# Altium PCB YFCX_4S5P_ZJB_V10_260724.PcbDoc
Units mm, origin at the board's own origin, x right, y up, seen from the top; angles counter-clockwise.
Board outline 85 x 54 mm, 2 copper layers (Top Layer, Bottom Layer); 95 components, 55 nets, 292 pads, 259 vias.
Unrouted connection lines stored in the file: 77.
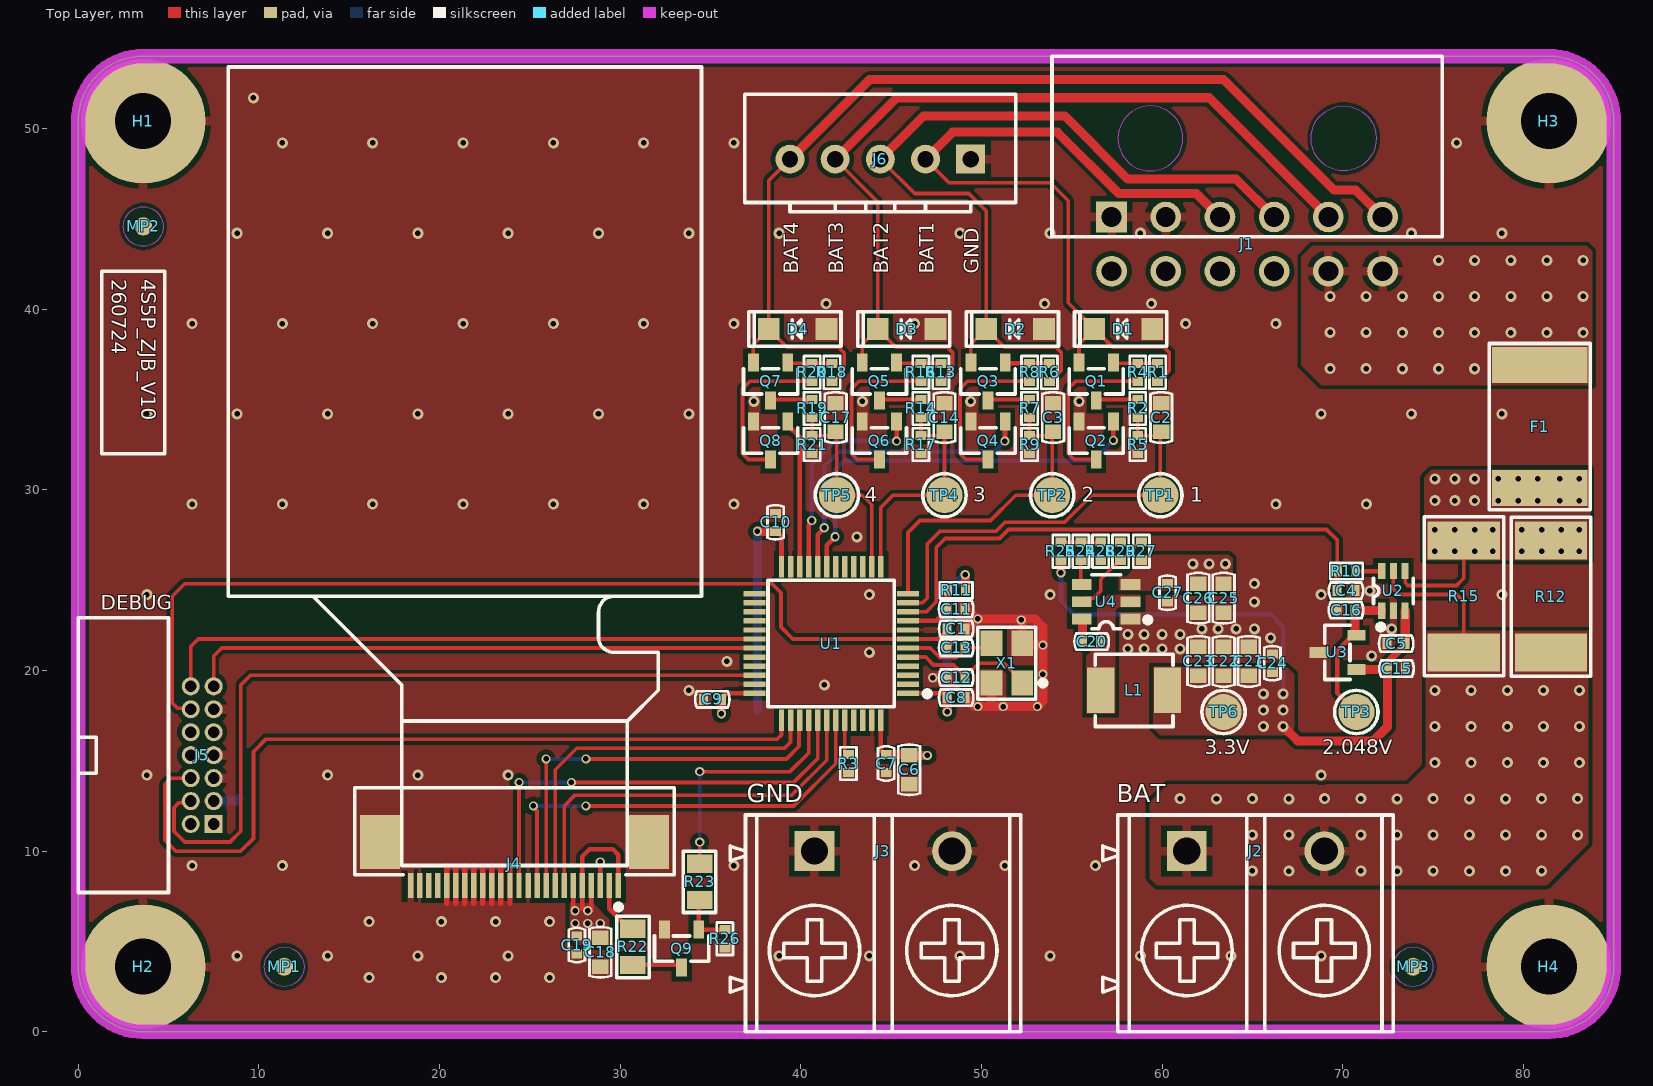
[diagram p0: Top Layer view]
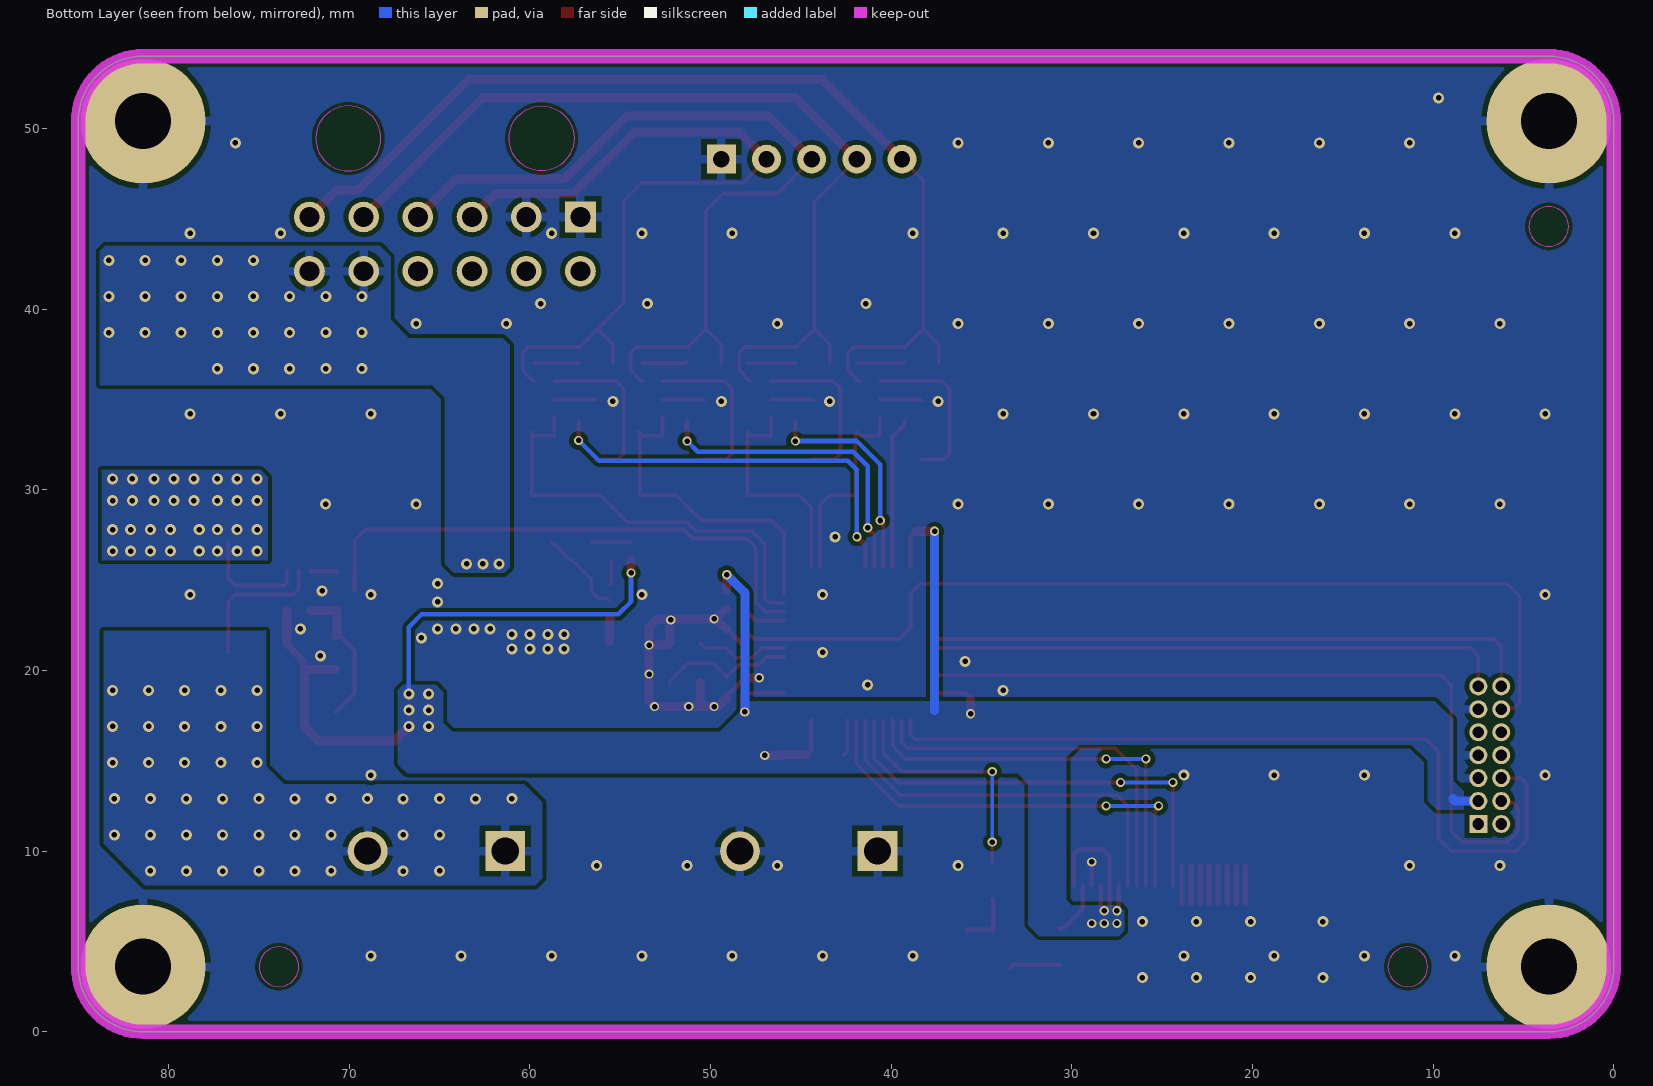
[diagram p1: Bottom Layer view, seen from below]
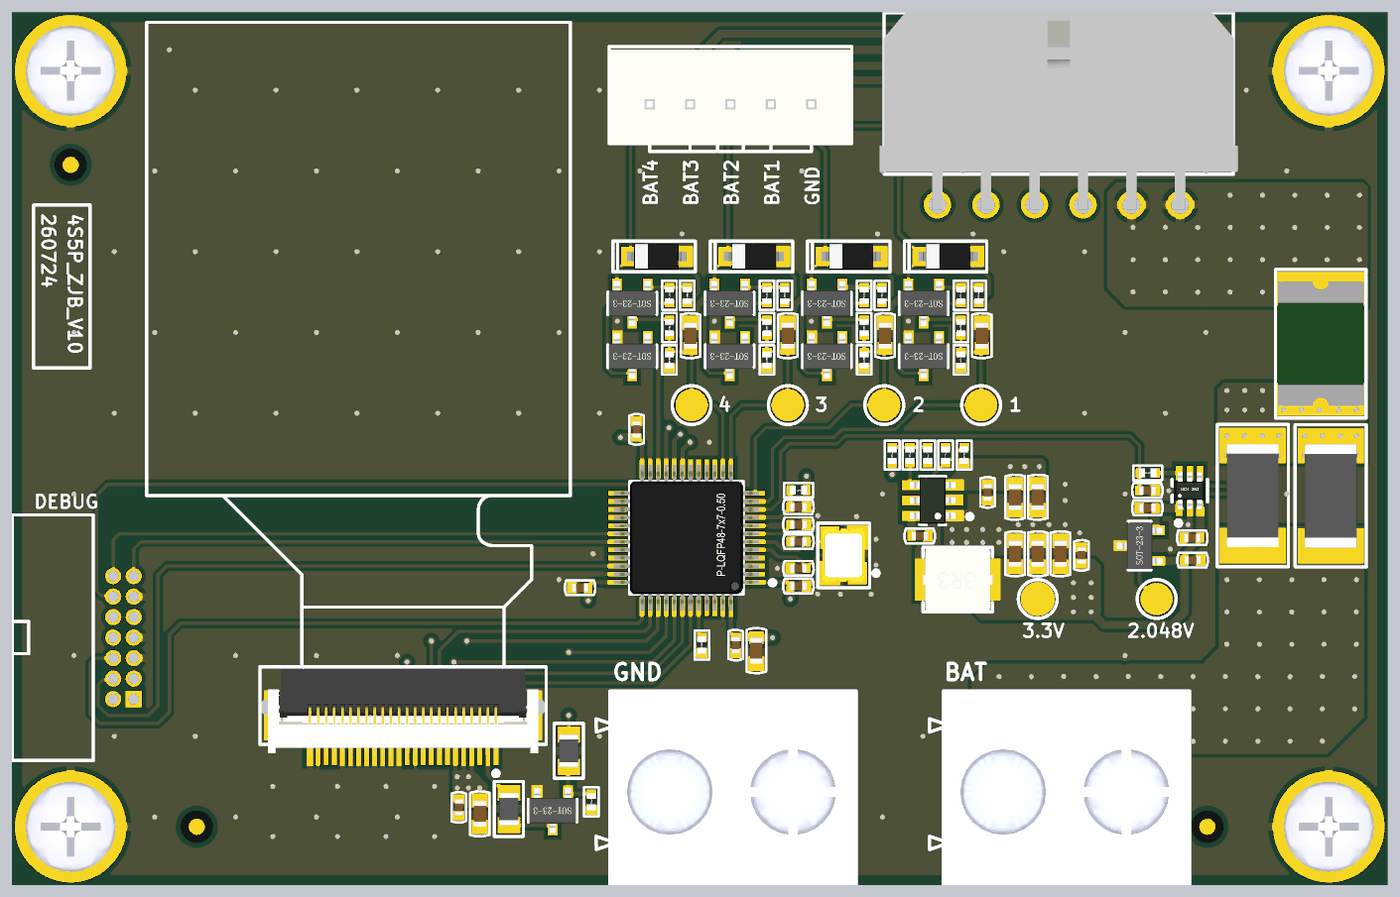
[diagram p2: 3D render of the assembled board from above, using the file's embedded part models]

## Layer stack, top to bottom
Top Solder: solder mask 0.0102, Solder Resist, Dk 3.5
Top Layer: signal copper 0.0356
Dielectric 1: dielectric 0.32, FR-4, Dk 4.8
Bottom Layer: signal copper 0.0356
Bottom Solder: solder mask 0.0102, Solder Resist, Dk 3.5

## Board outline
0,3.6 0,50.4 cw(c3.6,50.4) 3.6,54 81.4,54 cw(c81.4,50.4) 85,50.4 85,3.6 cw(c81.4,3.6) 81.4,0 3.6,0 cw(c3.6,3.6)

## Design rules (kind name [scope] priority, off if disabled: settings)
BoardOutlineClearance GND [InNamedPolygon('GND')] p1: gap=1 ignorepadtopadclearanceinfootprint=FALSE
Clearance Clearance_1 [InPoly vs OnLayer('Mechanical 1')] p1 off: gap=3 ignorepadtopadclearanceinfootprint=FALSE
Clearance [All] p2: gap=0.2 ignorepadtopadclearanceinfootprint=FALSE except(0.15: Arc-Arc Arc-Track Arc-Text Arc-Hole Track-Track Track-Text Track-Hole SMDPad-Text SMDPad-Hole THPad-Text THPad-Hole Via-Text Via-Hole Fill-Text Fill-Hole Poly-Text Poly-Hole Region-Text Region-Hole Text-Text Text-Hole; 0.254: SMDPad-Fill SMDPad-Poly SMDPad-Region THPad-THPad THPad-Fill THPad-Poly THPad-Region Via-Fill Via-Poly Via-Region)
ComponentClearance [All] p1: gap=0 collisioncheckmode=3 verticalgap=0.254 showdistances=FALSE
DiffPairsRouting DIFF-90 [All] p1: maxlimit=0.254 minlimit=0.15 mostfreqgap=0.2 toplayer_minwidth=0.15 toplayer_maxwidth=0.15 toplayer_prefwidth=0.15 bottomlayer_minwidth=0.15 bottomlayer_maxwidth=0.15 bottomlayer_prefwidth=0.15 maxuncoupledlength=12.7
DiffPairsRouting DIFF-100 [All] p2: maxlimit=0.254 minlimit=0.2 mostfreqgap=0.25 toplayer_minwidth=0.13 toplayer_maxwidth=0.381 toplayer_prefwidth=0.13 bottomlayer_minwidth=0.13 bottomlayer_maxwidth=0.381 bottomlayer_prefwidth=0.13 maxuncoupledlength=12.7
HoleSize [All] p1: absolutevalues=TRUE maxlimit=10 minlimit=0.025 maxpercent=80.000 minpercent=20.000
MinimumSolderMaskSliver [All] p1: minsoldermaskwidth=0.01
PlaneConnect PPCS [IsPad] p1: planeconnectstyle=Direct reliefexpansion=0.508 reliefentries=4 reliefconductorwidth=0.254 reliefairgap=0.254
PolygonConnect isThruPad [IsThruPin] p1: connectstyle=Relief reliefconductorwidth=0.5 reliefentries=4 polygonreliefangle="90 Angle" airgapwidth=0.3
PolygonConnect isPad [isPAd] p2: connectstyle=Direct reliefconductorwidth=0 reliefentries=4 polygonreliefangle="90 Angle" airgapwidth=0.254
PolygonConnect isVia [IsVia] p3: connectstyle=Direct reliefconductorwidth=0.254 reliefentries=4 polygonreliefangle="90 Angle" airgapwidth=0.254
RoutingVias VIA [All] p1: holewidth=0.152 width=0.254 viastyle="Through Hole" minholewidth=0.152 minwidth=0.254 maxholewidth=0.152 maxwidth=0.254 useviatemplates=TRUE viatemplateguid#1={80DF881C-B7F9-4C5A-8034-6BC3AFAA0DF8} viatemplateguid#2={52947D10-793B-470B-BFAB-9D86F86498F1} viatemplateguid#3={C292746C-0A8D-4DDD-BFB9-53B12805EE7E} viatemplatename#1=VIA20D12 viatemplatename#2=VIA24D12 viatemplatename#3=VIA30D15
SilkToSilkClearance [All] p1 off: silktosilkclearance=0.254
SilkToSolderMaskClearance [IsPad] p1: minsilkscreentomaskgap=0 clearancetoexposedcopper=TRUE
SolderMaskExpansion [IsVia] p1: expansion=0 istentingtop=TRUE useseparateexpansions=TRUE expansionbottom=0 istentingbottom=TRUE
SolderMaskExpansion SolderMaskExpansion_1 [All] p2: expansion=0 istentingtop=FALSE
SupplyNets "Schematic Supply Nets_5" [InNet('VCC_12V_BATPACK+')] p1: voltage=0.000
SupplyNets "Schematic Supply Nets_4" [InNet('GND')] p2: voltage=0.000
SupplyNets "Schematic Supply Nets_3" [InNet('VCC_12V_BATOUT')] p3: voltage=0.000
SupplyNets "Schematic Supply Nets_2" [InNet('VDDA')] p4: voltage=0.000
SupplyNets "Schematic Supply Nets_1" [InNet('LEDA')] p5: voltage=0.000
SupplyNets "Schematic Supply Nets" [InNet('VCC_2.048V_VREF')] p6: voltage=0.000
Width [All] p1: maxlimit=10 minlimit=0.15 preferedwidth=0.254
23 further rules are at their usual default settings.

## Components (designator, comment, footprint, x,y, rotation, side; value= is the part's Value field where it differs from the comment)
C1 "100nF/50V" C0402 48.6,22.3 r180 top
C2 "10uF/10V" C0603 59.95,34 r270 top
C3 "10uF/10V" C0603 53.962,34 r270 top
C4 "100nF/50V" C0402 70.178,24.421 r180 top
C5 "100nF/50V" C0402 72.955,21.488 r0 top
C6 "10uF/10V" C0603 46,14.5 r90 top
C7 "100nF/50V" C0402 44.726,14.847 r90 top
C8 "100nF/50V" C0402 48.6,18.5 r180 top
C9 "100nF/50V" C0402 35.1,18.4 r0 top
C10 "100nF/50V" C0402 38.6,28.2 r270 top
C11 "100nF/50V" C0402 48.6,23.4 r180 top
C12 "18pF/50V" C0402 48.6,19.6 r0 top
C13 "18pF/50V" C0402 48.6,21.25 r0 top
C14 "10uF/10V" C0603 47.95,34 r270 top
C15 "1uF/25V" C0402 72.975,20.102 r180 top
C16 "1uF/25V" C0402 70.18,23.336 r0 top
C17 "10uF/10V" C0603 41.925,34 r270 top
C18 "10uF/10V" C0603 28.9,4.4 r270 top
C19 "100nF/50V" C0402 27.6,4.8 r270 top
C20 "1uF/25V" C0402 56.1,21.6 r0 top
C21 "10uF/10V" C0603 64.8,20.5 r270 top
C22 "10uF/10V" C0603 63.4,20.5 r270 top
C23 "10uF/10V" C0603 62,20.5 r270 top
C24 "100nF/50V" C0402 66.1,20.4 r270 top
C25 "10uF/10V" C0603 63.4,24 r90 top
C26 "10uF/10V" C0603 62,24 r90 top
C27 "100nF/50V" C0402 60.3,24.3 r90 top
D1 "SMF14CA" SOD123 57.85,38.9 r0 top
D2 "SMF14CA" SOD123 51.862,38.9 r0 top
D3 "SMF14CA" SOD123 45.85,38.9 r0 top
D4 "SMF14CA" SOD123 39.825,38.9 r0 top
F1 "SMD2920-500-16" FUSE2920 80.9,33.5 r270 top
H1 "HOLE-M3/NI" HOLE6R90X3R10 3.6,50.4 r0 top
H2 "HOLE-M3/NI" HOLE6R90X3R10 3.6,3.6 r0 top
H3 "HOLE-M3/NI" HOLE6R90X3R10 81.4,50.4 r0 top
H4 "HOLE-M3/NI" HOLE6R90X3R10 81.4,3.6 r0 top
J1 "HC-MX3.0-2*6AW" HC-MX3R0-2X6AW 64.7,45.1 r180 top
J2 "KF7.62-2P" KF7R62-2P 65.172,10 r0 top
J3 "KF7.62-2P" KF7R62-2P 44.56,10 r0 top
J4 "0.5K-AS-24PWBG" 0R5K-AS-24PWBG 29.9,8.1 r180 top
J5 "HX JN1.27-2x7 WZ H4.9" STDC14-W 7.5,15.31 r270 top
J6 "HX25035-5A" HX25035-5A 44.4,48.3 r180 top
L1 "FXL0420-4R7-M" L0420 58.45,18.9 r0 top
MP1 "MARK-R3/NI" MARK-R3 11.399,3.6 r0 top
MP2 "MARK-R3/NI" MARK-R3 3.6,44.575 r0 top
MP3 "MARK-R3/NI" MARK-R3 73.891,3.6 r0 top
Q1 "AO3401A" SOT23-3 56.35,36 r0 top
Q2 "2N7002" SOT23-3 56.35,32.727 r0 top
Q3 "AO3401A" SOT23-3 50.362,36 r0 top
Q4 "2N7002" SOT23-3 50.362,32.727 r0 top
Q5 "AO3401A" SOT23-3 44.35,36 r0 top
Q6 "2N7002" SOT23-3 44.35,32.727 r0 top
Q7 "AO3401A" SOT23-3 38.325,36 r0 top
Q8 "2N7002" SOT23-3 38.325,32.727 r0 top
Q9 "2N7002" SOT23-3 33.4,4.6 r0 top
R1 "10K" R0402 59.75,36.5 r270 top
R2 "100K" R0402 58.65,34.5 r90 top
R3 "10K" R0402 42.633,14.847 r90 top
R4 "0R" R0402 58.65,36.5 r90 top
R5 "100K" R0402 58.65,32.5 r90 top
R6 "10K" R0402 53.762,36.5 r270 top
R7 "200K" R0402 52.662,34.5 r90 top
R8 "0R" R0402 52.662,36.5 r90 top
R9 "100K" R0402 52.662,32.5 r90 top
R10 "1K" R0402 70.2,25.5 r180 top
R11 "0R" R0402 48.606,24.435 r180 top
R12 "10mR" R2512 81.521,24.083 r270 top
R13 "10K" R0402 47.75,36.5 r270 top
R14 "300K" R0402 46.65,34.5 r90 top
R15 "10mR" R2512 76.7,24.1 r270 top
R16 "0R" R0402 46.65,36.5 r90 top
R17 "100K" R0402 46.65,32.5 r90 top
R18 "10K" R0402 41.725,36.5 r270 top
R19 "499K" R0402 40.625,34.5 r90 top
R20 "10K" R0402 40.625,36.5 r90 top
R21 "100K" R0402 40.625,32.5 r90 top
R22 "10R" R0805 30.7,4.7 r90 top
R23 "10R" R0805 34.4,8.3 r90 top
R24 "10K" R0402 55.5,26.6 r270 top
R25 "40.2K" R0402 54.4,26.6 r270 top
R26 "10K" R0402 35.8,5.15 r90 top value=1K
R27 "100K" R0402 58.85,26.6 r270 top
R28 "13K" R0402 56.6,26.6 r90 top
R29 "20K" R0402 57.7,26.6 r270 top
TP1 "TP-R2/NI" TP-R2 59.9,29.7 r90 top
TP2 "TP-R2/NI" TP-R2 53.911,29.7 r90 top
TP3 "TP-R2/NI" TP-R2 70.75,17.7 r270 top
TP4 "TP-R2/NI" TP-R2 47.95,29.7 r90 top
TP5 "TP-R2/NI" TP-R2 41.997,29.7 r90 top
TP6 "TP-R2/NI" TP-R2 63.4,17.7 r0 top
U1 "STM32F103C8T6" LQFP48-7X7X0R5 41.681,21.49 r90 top
U2 "INA199A1DCKR" SOT363 72.8,24.4 r90 top
U3 "REF3020AIDBZR" SOT23-3 69.7,21 r270 top
U4 "BL8032GCB6TR" SOT23-6 56.9,23.8 r180 top
X1 "X32258MSB4SI" X-4P-3R2X2R5-SMD 51.4,20.4 r90 top

## Footprints (in the part's own frame and the unit in brackets; to place one, negate y for a bottom-side part, rotate by r counter-clockwise, add the part's x,y. Pads: shape width x height; smd on the part's side, far side on the other; paste and mask are expansions set on the pad)
0R5K-AS-24PWBG [mm]
  rect 0.3x1.4 smd paste-2539.97 mask+0.05: 1(0,0) 2(0.5,0) 3(1,0) 4(1.5,0) 5(2,0) 6(2.5,0) 7(3,0) 8(3.5,0) 9(4,0) 10(4.5,0) 11(5,0) 12(5.5,0) 13(6,0) 14(6.5,0) 15(7,0) 16(7.5,0) 17(8,0) 18(8.5,0) 19(9,0) 20(9.5,0) 21(10,0) 22(10.5,0) 23(11,0) 24(11.5,0)
  rect 2.2x3 smd paste-2539.97 mask+0.05: 25(-1.7,-2.4) 26(13.2,-2.4)
  silkscreen extent -3.1,-5.4 14.6,1.5, body extent -3,-5.3 14.5,0, height 1.9
C0402 [mm]
  rect 0.5x0.6 smd paste-2539.97 mask+0.05: 1(-0.5,0) 2(0.5,0)
  silkscreen extent -0.95,-0.45 0.95,0.45, body extent -0.5,-0.25 0.5,0.25, height 0.5
C0603 [mm]
  rect 0.8x0.9 smd paste-2539.97 mask+0.05: 1(-0.8,0) 2(0.8,0)
  silkscreen extent -1.4,-0.6 1.4,0.6, body extent -0.8,-0.4 0.8,0.4, height 0.6
FUSE2920 [mm]
  rect 2x5.3 smd paste-2539.97 mask+0.05: 1(-3.4,0) 2(3.4,0)
  silkscreen extent -4.6,-2.8 4.6,2.8, body extent -3.85,-2.65 3.85,2.65, height 1
HC-MX3R0-2X6AW [mm]
  rect 1.7x1.7 hole 1.1 paste-2539.97 mask+0.05: 1(7.5,0)
  round 1.7 hole 1.1 paste-2539.97 mask+0.05: 2(7.5,3) 3(4.5,0) 4(4.5,3) 5(1.5,0) 6(1.5,3) 7(-1.5,0) 8(-1.5,3) 9(-4.5,0) 10(-4.5,3) 11(-7.5,0) 12(-7.5,3)
  Keep-Out Layer region: 3.55,-4.35 3.687,-5.039 4.077,-5.623 4.661,-6.013 5.35,-6.15 5.35,-6.15 6.039,-6.013 6.623,-5.623 7.013,-5.039 7.15,-4.35 7.15,-4.35 7.013,-3.661 6.623,-3.077 6.039,-2.687 5.35,-2.55 5.35,-2.55 4.661,-2.687 4.077,-3.077 3.687,-3.661 3.55,-4.35
  Keep-Out Layer region: -5.35,-6.15 -6.039,-6.013 -6.623,-5.623 -7.013,-5.039 -7.15,-4.35 -7.15,-4.35 -7.013,-3.661 -6.623,-3.077 -6.039,-2.687 -5.35,-2.55 -5.35,-2.55 -4.661,-2.687 -4.077,-3.077 -3.687,-3.661 -3.55,-4.35 -3.55,-4.35 -3.687,-5.039 -4.077,-5.623 -4.661,-6.013 -5.35,-6.15
  silkscreen extent -10.8,-8.9 10.8,1.1, body extent -11.07,-8.95 11.07,3.28, height 8.83
HOLE6R90X3R10 [mm]
  round 6.9 hole 3.1 paste-2539.97 mask+0.05: 1(0,0)
  body extent -2.8,-2.79 2.8,2.79, height 2.38
HX25035-5A [mm]
  rect 1.6x1.6 hole 0.9 paste-2539.97 mask+0.05: 1(-5,0)
  round 1.6 hole 0.9 paste-2539.97 mask+0.05: 2(-2.5,0) 3(0,0) 4(2.5,0) 5(5,0)
  silkscreen extent -7.5,-3.6 7.5,2.9, body extent -7.45,-3.4 7.45,2.35, height 7
KF7R62-2P [mm]
  rect 2.2x2.2 hole 1.5 paste-2539.97 mask+0.05: 1(-3.81,0)
  round 2.2 hole 1.5 paste-2539.97 mask+0.05: 2(3.81,0)
  silkscreen extent -8.47,-10 7.62,2, body extent -7.72,-10 7.52,2, height 12.4
L0420 [mm]
  rect 1.5x2.5 smd paste-2539.97 mask+0.05: 1(-1.85,0) 2(1.85,0)
  silkscreen extent -2.15,-2 2.15,2, body extent -2.15,-2 2.15,2, height 1.8
LQFP48-7X7X0R5 [mm]
  rect 0.3x1.2 smd paste-2539.97 mask+0.05: 1(-2.75,-4.25) 2(-2.25,-4.25) 3(-1.75,-4.25) 4(-1.25,-4.25) 5(-0.75,-4.25) 6(-0.25,-4.25) 7(0.25,-4.25) 8(0.75,-4.25) 9(1.25,-4.25) 10(1.75,-4.25) 11(2.25,-4.25) 12(2.75,-4.25) 25(2.75,4.25) 26(2.25,4.25) 27(1.75,4.25) 28(1.25,4.25) 29(0.75,4.25) 30(0.25,4.25) 31(-0.25,4.25) 32(-0.75,4.25) 33(-1.25,4.25) 34(-1.75,4.25) 35(-2.25,4.25) 36(-2.75,4.25)
  rect 1.2x0.3 smd paste-2539.97 mask+0.05: 13(4.25,-2.75) 14(4.25,-2.25) 15(4.25,-1.75) 16(4.25,-1.25) 17(4.25,-0.75) 18(4.25,-0.25) 19(4.25,0.25) 20(4.25,0.75) 21(4.25,1.25) 22(4.25,1.75) 23(4.25,2.25) 24(4.25,2.75) 37(-4.25,2.75) 38(-4.25,2.25) 39(-4.25,1.75) 40(-4.25,1.25) 41(-4.25,0.75) 42(-4.25,0.25) 43(-4.25,-0.25) 44(-4.25,-0.75) 45(-4.25,-1.25) 46(-4.25,-1.75) 47(-4.25,-2.25) 48(-4.25,-2.75)
  silkscreen extent -3.5,-5.61 3.5,3.5, body extent -4.5,-4.5 4.5,4.5, height 1.5
MARK-R3 [mm]
  round 1 smd paste-2539.97 mask+0.5: 1(0,0)
  Keep-Out Layer region: 0,-1.1 -0.421,-1.016 -0.778,-0.778 -1.016,-0.421 -1.1,0 -1.1,0 -1.016,0.421 -0.778,0.778 -0.421,1.016 0,1.1 0,1.1 0.421,1.016 0.778,0.778 1.016,0.421 1.1,0 1.1,0 1.016,-0.421 0.778,-0.778 0.421,-1.016 0,-1.1
R0402 [mm]
  rect 0.5x0.6 smd paste-2539.97 mask+0.05: 1(-0.5,0) 2(0.5,0)
  silkscreen extent -0.9,-0.45 0.9,0.45, body extent -0.53,-0.27 0.53,0.28, height 0.36
R0805 [mm]
  rect 1x1.4 smd paste-2539.97 mask+0.05: 1(-1,0) 2(1,0)
  silkscreen extent -1.7,-0.9 1.7,0.9, body extent -1,-0.6 1,0.6, height 0.5
R2512 [mm]
  rect 2.1x4 smd paste-2539.97 mask+0.05: 1(-3.1,0) 2(3.1,0)
  silkscreen extent -4.4,-2.2 4.4,2.2, body extent -3.2,-1.6 3.2,1.6, height 0.7
SOD123 [mm]
  rect 1.2x1.2 smd paste-2539.97 mask+0.05: 1(-1.6,0) 2(1.6,0)
  silkscreen extent -2.7,-0.95 2.4,0.95, body extent -1.85,-0.8 1.85,0.8, height 1.27
SOT23-3 [mm]
  rect 0.6x1 smd paste-2539.97 mask+0.05: 1(0.95,1.05) 2(-0.95,1.05) 3(0,-1.05)
  silkscreen extent -1.5,-0.7 1.5,0.7, body extent -1.45,-1.4 1.45,1.4, height 1.2
SOT23-6 [mm]
  rect 1.1x0.6 smd paste-2539.97 mask+0.05: 1(-1.35,0.95) 2(-1.35,0) 3(-1.35,-0.95) 4(1.35,-0.95) 5(1.35,0) 6(1.35,0.95)
  silkscreen extent -2.6,-1.5 0.8,1.5, body extent -1.4,-1.45 1.4,1.45, height 1.45
SOT363 [mm]
  rect 0.9x0.4 smd paste-2539.97 mask+0.05: 1(-1.1,0.65) 2(-1.1,0) 3(-1.1,-0.65) 4(1.1,-0.65) 5(1.1,0) 6(1.1,0.65)
  silkscreen extent -2.3,-1.1 0.7,1.1, body extent -1.13,-1 1.13,1, height 1
STDC14-W [mm]
  rect 1x1 hole 0.65 paste-2539.97 mask+0.05: 1(3.81,0)
  round 1 hole 0.65 paste-2539.97 mask+0.05: 2(3.81,-1.27) 3(2.54,0) 4(2.54,-1.27) 5(1.27,0) 6(1.27,-1.27) 7(0,0) 8(0,-1.27) 9(-1.27,0) 10(-1.27,-1.27) 11(-2.54,0) 12(-2.54,-1.27) 13(-3.81,0) 14(-3.81,-1.27)
  silkscreen extent -7.6,-7.5 7.6,-2.5
TP-R2 [mm]
  round 2 smd paste-2539.97 mask+0.05: 1(0,0)
  silkscreen extent -1.2,-1.2 1.2,1.2
X-4P-3R2X2R5-SMD [mm]
  rect 1.4x1.2 smd paste-2539.97 mask+0.05: 1(-1.1,-0.85) 2(1.1,-0.85) 3(1.1,0.85) 4(-1.1,0.85)
  silkscreen extent -2,-2.3 2,1.6, body extent -1.65,-1.3 1.65,1.3, height 1.1

## Part data
C1 C4 C5 C7 C8 C9 C10 C11 C19 C24 C27: JLCcode=C307331
C2 C3 C6 C14 C17 C18 C21 C22 C23 C25 C26: library part 100nF/50V, JLCcode=C19702
C12 C13: library part 100nF/50V, JLCcode=C1549
C15 C16 C20: library part 100nF/50V, JLCcode=C52923
D1 D2 D3 D4: library part TVS-BDIR, JLCcode=C41411783
F1: library part FUSE, JLCcode=C47753902
H1 H2 H3 H4: library part HOLE-M3
J1: JLCcode=C3294387
J2 J3: JLCcode=C707824
J4: JLCcode=C2911807
J5: library part STDC14, JLCcode=C46061775
J6: JLCcode=C442381
L1: library part INDUC, JLCcode=C167208
MP1 MP2 MP3: library part MARK-R3
Q1 Q3 Q5 Q7: library part MOS-P, JLCcode=C15127
Q2 Q4 Q6 Q8 Q9: library part MOS-N, JLCcode=C8545
R1 R3 R6 R13 R18 R20 R24: library part 1K, JLCcode=C25744
R2 R5 R9 R17 R21 R27: library part 1K, JLCcode=C25741
R4 R8 R11 R16: library part 1K, JLCcode=C17168
R7: library part 1K, JLCcode=C25764
R10: JLCcode=C11702
R12 R15: library part 1K, JLCcode=C2903468
R14: library part 1K, JLCcode=C25774
R19: library part 1K, JLCcode=C25793
R22 R23: library part 1K, JLCcode=C17415
R25: library part 1K, JLCcode=C25893
R26: library part 1K, JLCcode=C11702
R28: library part 1K, JLCcode=C25754
R29: library part 1K, JLCcode=C25765
TP1 TP2 TP3 TP4 TP5 TP6: library part TP-R2
U1: JLCcode=C8734
U2: JLCcode=C59135
U3: JLCcode=C26804
U4: JLCcode=C7436534
X1: library part XTAL, JLCcode=C2682774

## Via types
v1: diameter 0.61, hole 0.305, Top Layer to Bottom Layer, tented both sides, 225 vias
v2: diameter 0.508, hole 0.305, Top Layer to Bottom Layer, tented both sides, 34 vias

## Nets (pads, with @x,y where several pads share a name; then routed paths per layer and width w, separated by ;. In a path a pad name is that pad's centre, name@x,y a point inside that pad or via, vN(x,y) a via of type N, cw(c..) or ccw(c..) an arc to the next point about the centre after c; other vN are vias at no path point)
BAT1: D1.1 J1.5 J6.2 Q1.2 R1.2 | length 44.2
  Top Layer w0.203: J6.2 48.2,47 53.8,47 54.8,46 54.8,40.35 D1.1 ; Q1.2 55.4,38.05 D1.1 ; R1.2 59.8,36 60.4,36.6 60.4,37.6 60.1,37.9 57.25,37.9 D1.1
  Top Layer w0.5: J6.2 48.4,49.8 54.2,49.8 57.6,46.4 61.9,46.4 J1.5
BAT2: D2.1 J1.7 J6.3 Q3.2 R6.2 | length 47.5
  Top Layer w0.203: J6.3 46.3,46.4 49.3,46.4 50.262,45.438 D2.1 ; Q3.2 49.412,38.05 D2.1 ; R6.2 53.812,36 54.412,36.6 54.412,37.6 54.112,37.9 51.262,37.9 D2.1
  Top Layer w0.5: J6.3 46.8,50.7 54.6,50.7 58.1,47.2 64.1,47.2 J1.7
BAT3: D3.1 J1.9 J6.4 Q5.2 R13.2 | length 50.6
  Top Layer w0.203: J6.4 44.25,45.95 D3.1 ; Q5.2 43.4,38.05 D3.1 ; R13.2 47.8,36 48.4,36.6 48.4,37.6 48.1,37.9 45.25,37.9 D3.1
  Top Layer w0.5: J6.4 45.3,51.7 62.6,51.7 J1.9
BAT4: D4.1 J1.11 J6.5 Q7.2 R18.2 | length 56.5
  Top Layer w0.203: Q7.2 37.375,38.05 D4.1 ; J6.5 38.225,47.125 D4.1 ; R18.2 41.775,36 42.4,36.625 42.4,37.575 42.075,37.9 39.225,37.9 D4.1
  Top Layer w0.5: J6.5 43.8,52.7 63.4,52.7 69.5,46.6 70.7,46.6 J1.11
BOOT0: R3.2 U1.44 | length 2
  Top Layer w0.203: U1.44 42.431,15.499 42.583,15.347 R3.2
GND: C1.1 C2.1 C3.1 C4.1 C5.1 C6.1 C7.1 C8.1 C9.1 C10.1 C11.1 C12.1 C13.1 C14.1 C15.1 C16.1 C17.1 C18.2 C19.2 C21.1 C22.1 C23.1 C24.1 C25.1 C26.1 C27.1 D1.2 D2.2 D3.2 D4.2 H1.1 H2.1 H3.1 H4.1 J1.1 J1.3 J3.1 J3.2 J4.3 J4.11 J4.13 J4.14 J4.15 J4.16 J4.17 J4.18 J4.19 J4.20 J4.23 J4.24 J4.25 J4.26 J5.5 J5.7 J5.11 J6.1 Q2.2 Q4.2 Q6.2 Q8.2 Q9.2 R3.1 R5.1 R9.1 R17.1 R21.1 R26.1 R28.1 R29.1 U1.8 U1.23 U1.35 U1.47 U2.2 U3.3 U4.1 X1.2 X1.4 | length 40
  Top Layer w0.254: J4.3 v2(28.9,9.4) ; C12.1@48.1,19.558 C8.1@49.096,18.562
  Top Layer w0.3: 20.4,7.1 J4.20 20.4,9.2 ; 20.9,7.1 J4.19 20.9,9.2 ; 21.4,7.1 J4.18 21.4,9.2 ; 21.9,7.1 J4.17 21.9,9.2 ; 22.4,7.1 J4.16 22.4,9.2 ; 22.9,7.1 J4.15 22.9,9.2 ; 23.4,7.1 J4.14 23.4,9.2 ; 23.9,7.1 J4.13 23.9,9.2 ; C13.1@48.1,21.292 C1.1@49.062,22.254
  Top Layer w0.5: C1.1 v2(49.8,22.85)
  Top Layer w0.508: v2(47.3,19.6) C12.1 C12.1@48.1,19.558 ; C8.1@49.096,18.562 49.096,18.462 49.104,18.454 49.146,18.454 49.6,18 v2(49.8,18) 50.6,18 ; C11.1 v2(49.8,22.85) v2@52.2,22.85 ; X1.4 50.55,18.05 50.6,18 ; 50.6,18 v2(51.2,18) v2(53.1,18) 53.4,18.3 v2(53.4,19.8) v2(53.4,21.4) ; v2@52.2,22.85 52.95,22.85 53.4,22.4 v2(53.4,21.4) ; v2@52.2,22.85 52.25,22.8 X1.2 52.35,21.4 v2(53.4,21.4)
  other v1: 16.1,3 20.1,3 23.1,3 26.1,3 8.8,4.2 13.8,4.2 18.8,4.2 23.8,4.2 38.8,4.2 43.8,4.2 48.8,4.2 53.8,4.2 58.8,4.2 63.8,4.2 68.8,4.2 16.1,6.1 20.1,6.1 23.1,6.1 26.1,6.1 6.3,9.2 11.3,9.2 36.3,9.2 46.3,9.2 51.3,9.2 56.3,9.2 3.8,14.2 13.8,14.2 18.8,14.2 23.8,14.2 68.8,14.2 33.8,18.9 41.3,19.2 35.9,20.5 71.6,20.8 43.8,21 58.1,21.2 59,21.2 60,21.2 61,21.2 66,21.8 58.1,22 59,22 60,22 61,22 62.2,22.3 63.1,22.3 64.1,22.3 65.1,22.3 72.7,22.3 65.1,23.8 3.8,24.2 43.8,24.2 53.8,24.2 68.8,24.2 78.8,24.2 71.5,24.4 65.1,24.8 43.1,27.4 6.3,29.2 11.3,29.2 16.3,29.2 21.3,29.2 26.3,29.2 31.3,29.2 36.3,29.2 66.3,29.2 71.3,29.2 3.8,34.2 8.8,34.2 13.8,34.2 18.8,34.2 23.8,34.2 28.8,34.2 33.8,34.2 68.8,34.2 73.8,34.2 78.8,34.2 37.4,34.9 43.4,34.9 49.4,34.9 55.4,34.9 6.3,39.2 11.3,39.2 16.3,39.2 21.3,39.2 26.3,39.2 31.3,39.2 36.3,39.2 46.3,39.2 61.3,39.2 66.3,39.2 41.4,40.3 53.5,40.3 59.4,40.3 8.8,44.2 13.8,44.2 18.8,44.2 23.8,44.2 28.8,44.2 33.8,44.2 38.8,44.2 48.8,44.2 53.8,44.2 58.8,44.2 73.8,44.2 78.8,44.2 11.3,49.2 16.3,49.2 21.3,49.2 26.3,49.2 31.3,49.2 36.3,49.2 76.3,49.2 9.7,51.7
  other v2: 52.2,22.8
LEDA: C5.2 C6.2 C7.2 C8.2 C9.2 C10.2 C15.2 C18.1 C19.1 C21.2 C22.2 C23.2 C24.2 J4.1 J4.4 J4.5 J4.6 J5.3 L1.2 R11.1 R25.2 TP6.1 U1.1 U1.24 U1.36 U1.48 U2.3 U3.1 | length 76.8
  Top Layer w0.254: v2@27.4,6.9 J4.6 ; 27.9,6.8 J4.5 27.9,9.7 28.3,10.1 29.6,10.1 29.9,9.8 J4.1 ; v2@28.4,6.7 J4.4 ; C9.2@35.6,18.45 35.89,18.74 U1.36 ; C10.2@38.65,27.7 38.931,27.419 U1.24 ; U1.48 44.431,15.591 44.676,15.347 C7.2 ; U1.1 47.91,18.74 48.1,18.55 C8.2
  Top Layer w0.4: C15.2 72.525,20.152 72.525,20.508 73.455,21.438 C5.2
  Top Layer w0.5: v2(49.1,25.3) 49.106,25.294 R11.1 ; v2(54.4,25.4) R25.2
  Top Layer w0.508: v2(35.6,17.6) C9.2 ; v2(37.6,27.7) C10.2 ; C7.2 44.73,15.343 45.957,15.343 C6.2 v2(47,15.3) ; v2(48.1,17.7) C8.2 ; v1(66.7,16.9) 67.5,16.1 71.7,16.1 72.475,16.875 C15.2 72.475,20.06 72.465,20.05 U3.1 ; U2.3 73.453,23.297 C5.2@73.453,21.491
  Bottom Layer w0.254: v2(54.4,25.4) 54.4,23.8 55.1,23.1 66,23.1 66.7,22.4 v1(66.7,18.7)
  Bottom Layer w0.5: v2@48.1,17.845 48.1,24.3 v2(49.1,25.3)
  Bottom Layer w0.508: J5.3 8.77,12.77 8.9,12.9 ; 37.6,17.8 v2(37.6,27.7)
  other v1: 65.6,16.9 65.6,17.8 66.7,17.8 65.6,18.7
  other v2: 27.5,6 28.2,6 28.9,6 27.5,6.7 28.2,6.7
LEDK: J4.2 R22.2 | length 3.1
  Top Layer w0.254: J4.2 29.4,6.8 30.5,5.7 R22.2
NetC20_1: C20.1 U4.6 | length 1.3
  Top Layer w0.508: U4.6 55.554,22.85 55.6,22.804 C20.1
NetC20_2: C20.2 L1.1 U4.2
NetF1_2: F1.2 R12.1 R15.1 U2.4 | length 6.2
  Top Layer w0.203: U2.4 73.45,24.85 73.6,24.7 76.3,24.7 76.7,25.1 R15.1
  other v1: 75.1,26.6 76.2,26.6 77.3,26.6 78.3,26.6 79.9,26.6 81,26.6 82.1,26.6 83.1,26.6 75.1,27.8 76.2,27.8 77.3,27.8 78.3,27.8 79.9,27.8 81,27.8 82.1,27.8 83.1,27.8 75.1,29.4 76.2,29.4 77.3,29.4 78.6,29.4 79.7,29.4 80.8,29.4 82,29.4 83.1,29.4 75.1,30.6 76.2,30.6 77.3,30.6 78.6,30.6 79.7,30.6 80.8,30.6 82,30.6 83.1,30.6
NetQ1_1: Q1.1 R1.1 R4.2 | length 2.5
  Top Layer w0.203: Q1.1 57.35,37 R4.2 R1.1
NetQ1_3: Q1.3 R2.2 | length 2.3
  Top Layer w0.203: Q1.3 56.4,35 R2.2
NetQ2_3: Q2.3 R4.1 | length 9.3
  Top Layer w0.203: Q2.3 55.123,31.677 54.8,32 54.8,35.6 55.2,36 R4.1
NetQ3_1: Q3.1 R6.1 R8.2 | length 2.5
  Top Layer w0.254: Q3.1 51.362,37 R8.2 R6.1
NetQ3_3: Q3.3 R7.2 | length 2.3
  Top Layer w0.203: Q3.3 50.412,35 R7.2
NetQ4_3: Q4.3 R8.1 | length 9.3
  Top Layer w0.203: Q4.3 49.134,31.677 48.812,32 48.812,35.6 49.212,36 R8.1
NetQ5_1: Q5.1 R13.1 R16.2 | length 2.7
  Top Layer w0.203: Q5.1 45.35,37 46.85,37 R13.1@47.95,37
NetQ5_3: Q5.3 R14.2 | length 2.3
  Top Layer w0.203: Q5.3 44.4,35 R14.2
NetQ6_3: Q6.3 R16.1 | length 9.3
  Top Layer w0.203: Q6.3 43.123,31.677 42.8,32 42.8,35.6 43.2,36 R16.1
NetQ7_1: Q7.1 R18.1 R20.2 | length 2.7
  Top Layer w0.203: Q7.1 39.325,37 40.825,37 R18.1@41.925,37
NetQ7_3: Q7.3 R19.2 | length 2.3
  Top Layer w0.203: Q7.3 38.375,35 R19.2
NetQ8_3: Q8.3 R20.1 | length 9.3
  Top Layer w0.203: Q8.3 37.098,31.677 36.775,32 36.775,35.6 37.175,36 R20.1
NetQ9_1: Q9.1 R23.1 R26.2 | length 3.1
  Top Layer w0.254: R23.1 34.35,7.25 Q9.1 R26.2
NetQ9_3: Q9.3 R22.1 | length 2.8
  Top Layer w0.254: R22.1 33.25,3.7 Q9.3
NetR10_1: R10.1 U2.6 | length 1.4
  Top Layer w0.254: R10.1 U2.6
NetR24_1: R24.1 R25.1 R28.2 | length 2.2
  Top Layer w0.203: R25.1 R28.2
NetR24_2: R24.2 U4.4 | length 1.4
  Top Layer w0.203: R24.2 55.5,24.8 U4.4
NetR27_1: R27.1 R29.2 U4.5 | length 5
  Top Layer w0.203: U4.5 55.748,23.998 56.198,23.998 56.6,24.4 56.6,25.05 57.65,26.1 R29.2 ; R29.2@57.75,26.1 58.602,26.952 58.702,26.952 R27.1
NRST: C1.2 J5.12 U1.7 | length 52.9
  Top Layer w0.203: J5.12 6.18,17.9 5.5,17.9 5.2,18.2 5.2,24.1 5.9,24.8 38.4,24.8 38.9,24.3 38.9,22.4 39.56,21.74 U1.7 47.59,21.74 48.1,22.25 C1.2
OSC_IN: C12.2 U1.5 X1.1 | length 7.6
  Top Layer w0.203: U1.5 46.91,20.74 47.35,20.3 48.45,20.3 C12.2@49.1,19.65 ; C12.2 C12.2@49.1,19.65 ; X1.1 52.25,19.4 51.25,20.4 49.85,20.4 C12.2@49.1,19.65
OSC_OUT: C13.2 U1.6 X1.3 | length 5.2
  Top Layer w0.203: U1.6 47.16,21.24 47.701,20.699 48.598,20.699 48.951,21.052 49.1,21.2 C13.2 50.3,21.25 X1.3
PA0/ADC_CURR: C4.2 R10.2 U1.10 | length 30.5
  Top Layer w0.203: U1.10 46.94,23.24 47.5,23.8 47.5,26.8 48,27.3 51,27.3 51.5,27.8 69.1,27.8 69.7,27.2 R10.2
  Top Layer w0.254: C4.2 69.689,24.432 69.689,25.489 R10.2
PA1/ADC_BAT1: C2.2 R2.1 R5.2 TP1.1 U1.11 | length 24.1
  Top Layer w0.203: U1.11 46.74,23.74 47,24 47,27 47.7,27.7 50.8,27.7 51.3,28.2 54.6,28.2 56.1,29.7 TP1.1 59.9,33.15 C2.2 59.75,33 R5.2 R2.1
PA2/ADC_BAT2: C3.2 R7.1 R9.2 TP2.1 U1.12 | length 18.1
  Top Layer w0.203: U1.12 45.931,27.631 46.6,28.3 50.5,28.3 51.9,29.7 TP2.1 53.911,33.149 C3.2 53.762,33 R9.2 R7.1
PA3/ADC_BAT3: C14.2 R14.1 R17.2 TP4.1 U1.13 | length 13
  Top Layer w0.203: U1.13 44.431,29.031 45.1,29.7 TP4.1 C14.2 47.75,33 R17.2 R14.1
PA4/ADC_BAT4: C17.2 R19.1 R21.2 TP5.1 U1.14 | length 11.5
  Top Layer w0.203: R19.1 R21.2 41.725,33 C17.2 41.997,33.128 TP5.1 43.4,29.7 43.931,29.169 U1.14
PA9/USART1_TX: J5.14 U1.30 | length 33.6
  Top Layer w0.203: J5.14 6.23,21.33 6.64,21.74 U1.30
PA10/USART1_RX: J5.13 U1.31 | length 31.8
  Top Layer w0.203: J5.13 7.5,20.8 7.94,21.24 U1.31
PA15/SPI1_NSS: J4.8 U1.38 | length 21.3
  Top Layer w0.203: J4.8 26.4,14.5 27.6,15.7 39.1,15.7 39.431,16.031 U1.38
PB1/CTL_BAT1_H: Q2.1 U1.19 | length 22.7
  Top Layer w0.254: U1.19 41.431,26.931 v2(41.9,27.4) ; Q2.1 57.3,32.727 v2(57.302,32.729)
  Bottom Layer w0.254: v2(41.9,27.4) 41.9,31.1 42.4,31.6 56.173,31.6 v2(57.302,32.729)
PB2/CTL_BAT2_H: Q4.1 U1.20 | length 17.4
  Top Layer w0.254: U1.20 40.931,27.518 41.3,27.886 v2(41.3,27.9) ; v2(51.3,32.7) 51.3,33.766 Q4.1
  Bottom Layer w0.254: v2(41.3,27.9) 41.3,31.3 42.1,32.1 50.7,32.1 v2(51.3,32.7)
PB3/SPI1_SCK: J4.9 U1.39 | length 22.7
  Top Layer w0.203: J4.9 v2(25.9,15.1) ; v2(28.1,15.1) 39.2,15.1 39.9,15.8 39.9,17.209 U1.39
  Bottom Layer w0.203: v2(25.9,15.1) v2(28.1,15.1)
PB4/TFT_BL: R23.2 U1.40 | length 13.4
  Top Layer w0.203: R23.2 v2(34.4,10.5) ; v2(34.4,14.4) 39.4,14.4 40.431,15.431 U1.40
  Bottom Layer w0.203: v2(34.4,10.5) v2(34.4,14.4)
PB5/SPI1_MOSI: J4.12 U1.41 | length 24.9
  Top Layer w0.203: J4.12 v2(24.4,13.8) ; v2(27.3,13.8) 39.6,13.8 40.931,15.131 U1.41
  Bottom Layer w0.203: v2(24.4,13.8) v2(27.3,13.8)
PB6/TFT_RES: J4.7 U1.42 | length 22.2
  Top Layer w0.203: J4.7 26.9,12.5 27.5,13.1 39.5,13.1 41.431,15.031 U1.42
PB7/TFT_DC: J4.10 U1.43 | length 24.6
  Top Layer w0.203: v2(25.2,12.5) 25.2,12.418 25.4,12.218 J4.10 ; v2(28.1,12.5) 39.6,12.5 41.931,14.831 U1.43
  Bottom Layer w0.203: v2(25.2,12.5) v2(28.1,12.5)
PB10/CTL_BAT3_H: Q6.1 U1.21 | length 12
  Top Layer w0.254: U1.21 40.431,28.063 40.6,28.231 v2(40.6,28.3) ; v2(45.3,32.7) Q6.1
  Bottom Layer w0.254: v2(40.6,28.3) 40.6,31.4 41.9,32.7 v2(45.3,32.7)
PB11/CTL_BAT4_H: Q8.1 U1.22 | length 8.3
  Top Layer w0.254: Q8.1 39.275,33.577 39.931,32.921 U1.22
SWCLK: J5.6 U1.37 | length 45.3
  Top Layer w0.203: J5.6 5.14,14.04 4.8,13.7 4.8,10.6 5.4,10 9,10 9.7,10.7 9.7,15.5 10.4,16.2 38.7,16.2 38.931,16.431 U1.37
SWDIO: J5.4 U1.34 | length 43.3
  Top Layer w0.203: J5.4 6.144,12.684 5.584,12.684 5.3,12.4 5.3,11.1 5.9,10.5 8.4,10.5 9,11.1 9,19.2 9.54,19.74 U1.34
VCC_2.048V_VREF: C16.2 TP3.1 U2.1 U3.2 | length 8.2
  Top Layer w0.254: TP3.1 69.7,18.75 69.7,21.1 70.55,21.95 U3.2
  Top Layer w0.508: U3.2 70.726,21.95 70.68,21.996 C16.2 70.68,23.322 70.684,23.318 72.132,23.318 U2.1
VCC_12V_BATOUT: J2.1 J2.2 R12.2 R15.2 U2.5 | length 8
  Top Layer w0.203: U2.5 72.8,24.5 73.1,24.2 76.3,24.2 76.7,23.8 R15.2
  other v1: 65,8.9 67.009,8.893 71,8.9 73.009,8.893 75,8.9 77.009,8.893 79.009,8.893 81,8.9 65,10.9 67.009,10.893 71,10.9 73.009,10.893 75,10.9 77.009,10.893 79.009,10.893 81,10.9 83,10.9 61,12.9 63.009,12.893 65,12.9 67.009,12.893 69,12.9 71,12.9 73.009,12.893 75,12.9 77.009,12.893 79.009,12.893 81,12.9 83,12.9 77.109,14.893 79.109,14.893 75.1,14.9 81.1,14.9 83.1,14.9 75.1,16.9 77.109,16.893 79.109,16.893 81.1,16.9 83.1,16.9 75.1,18.9 77.109,18.893 79.109,18.893 81.1,18.9 83.1,18.9
VCC_12V_BATPACK+: C25.2 C26.2 C27.2 F1.1 J1.10 J1.12 R27.2 U4.3
  other v1: 61.7,25.9 62.6,25.9 63.5,25.9 69.292,36.707 71.291,36.707 73.3,36.7 75.3,36.7 77.3,36.7 69.292,38.707 71.291,38.707 73.3,38.7 75.3,38.7 77.3,38.7 79.3,38.7 81.3,38.7 83.3,38.7 73.3,40.7 75.3,40.7 77.3,40.7 79.3,40.7 81.3,40.7 83.3,40.7 69.292,40.707 71.291,40.707 75.3,42.7 77.3,42.7 79.3,42.7 81.3,42.7 83.3,42.7
VDDA: C11.2 R11.2 U1.9 | length 3.5
  Top Layer w0.254: U1.9 47.49,22.74 48.1,23.35 C11.2 48.103,23.403 48.103,24.432 R11.2
pads on no net: J1.2 J1.4 J1.6 J1.8 J4.21 J4.22 J5.1 J5.2 J5.8 J5.9 J5.10 MP1.1 MP2.1 MP3.1 U1.2 U1.3 U1.4 U1.15 U1.16 U1.17 U1.18 U1.25 U1.26 U1.27 U1.28 U1.29 U1.32 U1.33 U1.45 U1.46

## Polygon pours and split planes (outlines as drawn)
GND on Top Layer "GND_L01_P016" (solid, remove dead copper, pour order 16): 0,3.6 0,50.4 cw(c3.6,50.4) 3.6,54 81.4,54 cw(c81.4,50.4) 85,50.4 85,3.6 cw(c81.4,3.6) 81.4,0 3.6,0 cw(c3.6,3.6)
LEDA on Top Layer "LEDA_L01_P012" (solid, pour order 12): 27.2,7.1 27.2,5.2 27.6,4.8 29.4,4.8 29.4,6.2 28.5,7.1
VCC_12V_BATOUT on Top Layer "VCC_12V_BATOUT_L01_P005" (solid, pour order 5): 73.6,13.7 74.6,14.7 74.6,22.2 83.6,22.2 83.6,10.4 81.3,8.1 59.7,8.1 59.3,8.5 59.3,12.7 60.3,13.7
VCC_12V_BATPACK+ on Top Layer "VCC_12V_BATPACK+_L01_P003" (solid, pour order 3): 83.5,43.5 83.8,43.2 83.8,35.8 68.8,35.8 67.7,36.9 67.7,42.9 68.3,43.5
NetF1_2 on Top Layer "NETF1_2_L01_P004" (solid, pour order 4): 83.7,31.1 74.9,31.1 74.5,30.7 74.5,26.1 83.7,26.1
LEDA on Top Layer "LEDA_L01_P002" (solid, pour order 2): 59.5,20.2 66.9,20.2 67.3,19.8 67.3,16.8 66.9,16.4 59.9,16.4 59.5,16.8
NetC20_2 on Top Layer "NETC20_2_L01_P001" (solid, pour order 1): 58.8,24.2 57,24.2 56.4,23.6 56.4,21.4 55.8,20.8 55.8,17.6 57.4,17.6 57.4,23.3 57.6,23.5 58.8,23.5
VCC_12V_BATPACK+ on Top Layer "VCC_12V_BATPACK+_L01_P000" (solid, pour order 0): 57.6,24.4 63.9,24.4 63.9,26.2 63.7,26.4 58.5,26.4 58.5,25.7 58,25.2 57.6,25.2
GND on Bottom Layer "GND_L02_P017" (solid, remove dead copper, pour order 17): 0,3.6 0,50.4 cw(c3.6,50.4) 3.6,54 81.4,54 cw(c81.4,50.4) 85,50.4 85,3.6 cw(c81.4,3.6) 81.4,0 3.6,0 cw(c3.6,3.6)
LEDA on Bottom Layer "LEDA_L02_P013" (solid, pour order 13): 65.2,19.2 67,19.2 67.3,18.9 67.3,14.8 66.8,14.3 33,14.3 32.4,13.7 32.4,5.9 31.8,5.3 27.4,5.3 27.1,5.6 27.1,6.7 27.4,7 30,7 30.3,7.3 30.3,15.2 29.6,15.9 11.2,15.9 10.3,15 10.3,12.8 9.8,12.3 8.3,12.3 8.3,13.3 8.9,13.9 8.9,17.3 9.9,18.3 47.8,18.3 49.5,16.6 64.3,16.6 64.8,17.1 64.8,18.8
VCC_12V_BATPACK+ on Bottom Layer "Bottom Layer-VCC_12V_BATPACK+" (solid, pour order 11): 61.4,25.4 64.2,25.4 64.7,25.9 64.7,35.1 65.4,35.8 83.8,35.8 83.8,43.2 83.5,43.5 68.3,43.5 67.7,42.9 67.7,39.4 66.7,38.4 61.5,38.4 61.1,38 61.1,25.7
NetF1_2 on Bottom Layer "NETF1_2_L02_P007" (solid, pour order 7): 83.7,31.1 74.9,31.1 74.5,30.7 74.5,26.1 83.7,26.1
VCC_12V_BATOUT on Bottom Layer "VCC_12V_BATOUT_L02_P008" (solid, pour order 8): 73.6,13.7 74.6,14.7 74.6,22.2 83.6,22.2 83.6,10.4 81.3,8.1 59.7,8.1 59.3,8.5 59.3,12.7 60.3,13.7

## Keep-outs
Keep-Out Layer:
  the board outline again, w0.8

## Other copper
Top Layer:
  pour cut-out: 18.2,7.2 18.2,8.9 17.9,8.9 17.9,7.2
  pour cut-out: 18.6,9 18.6,7.2 18.8,7.2 18.8,9
  pour cut-out: 20.2,8.95 24.1,8.95 24.1,7.25 20.2,7.25

## Silkscreen, mask and mechanical layers (free items; w line width, h text height)
Top Overlay:
  lines w0.2: 13,24.1 17.9,19.2 17.9,17.2 ; 29.607,24.1 ccw(c29.607,23.359) 29.083,23.883 ccw(c29.766,23.2) 28.8,23.2 28.8,21.807 ccw(c29.541,21.807) 29.017,21.283 ccw(c29.7,21.966) 29.7,21 32.1,21 32.1,18.9 30.4,17.2 ; 8.3,24.1 8.3,24.1 ; 8.3,24.1 8.3,24.1 ; 8.3,24.1 34.5,24.1 34.5,53.4 8.3,53.4 8.3,24.1 ; 17.9,17.2 30.4,17.2 ; 17.9,17.2 17.9,9.2 30.4,9.2 30.4,17.2 ; 30.4,17.2 30.4,17.2 ; 1.3,32 1.3,42.1 4.8,42.1 4.8,32 1.3,32
  text "BAT4" at 39.85,41.95 h0.8 r90
  text "BAT3" at 42.35,41.95 h0.8 r90
  text "BAT2" at 44.85,41.95 h0.8 r90
  text "BAT1" at 47.35,41.95 h0.8 r90
  text "GND" at 49.85,41.95 h0.8 r90
  text "260724" at 1.85,41.65 h0.8 r270
  text "4S5P_ZJB_V10" at 3.483,41.65 h0.8 r270
  text "4" at 43.55,29.35 h0.8
  text "3" at 49.55,29.35 h0.8
  text "2" at 55.55,29.35 h0.8
  text "1" at 61.55,29.35 h0.8
  text "DEBUG" at 1.25,23.35 h0.8
  text "3.3V" at 62.35,15.35 h0.8
  text "2.048V" at 68.85,15.35 h0.8
  text "GND" at 37,12.7 h1
  text "BAT" at 57.5,12.7 h1
Mechanical 1:
  the board outline again, w0.1
Drill Drawing:
  circle w0.254: c93.656,10.2 r0.847
  lines w0.254: 92.809,5.967 93.233,5.967 93.233,5.543 94.079,5.543 94.079,5.967 94.503,5.967 94.503,6.813 94.079,6.813 94.079,7.237 93.233,7.237 93.233,6.813 92.809,6.813 92.809,5.967 ; 92.809,13.163 94.503,13.163 94.503,14.857 92.809,14.857 92.809,13.163 ; 92.809,16.973 93.656,17.397 94.503,16.973 94.079,17.82 94.503,18.667 93.656,18.243 92.809,18.667 93.233,17.82 92.809,16.973 ; 92.809,21.207 93.233,21.207 93.656,20.783 94.079,21.207 94.503,21.207 94.079,21.63 94.503,22.053 94.079,22.053 93.656,22.477 93.233,22.053 92.809,22.053 93.233,21.63 92.809,21.207 ; 92.809,26.287 94.503,26.287 93.656,24.593 92.809,26.287
  lines w0.381: 91.291,4.4 366.905,4.4 ; 91.291,27.26 366.905,27.26 ; 105.283,0.59 105.283,31.07 ; 120.519,0.59 120.519,31.07 ; 149.466,0.59 149.466,31.07 ; 162.315,0.59 162.315,31.07 ; 180.954,0.59 180.954,31.07 ; 219.043,0.59 219.043,31.07 ; 234.025,0.59 234.025,31.07 ; 252.968,0.59 252.968,31.07 ; 276.329,0.59 276.329,31.07 ; 298.015,0.59 298.015,31.07 ; 331.889,0.59 331.889,31.07 ; 91.291,0.59 366.905,0.59 366.905,31.07 91.291,31.07 91.291,0.59
  text "Symbol" at 93.577,28.403 h1.83
  text "Count" at 106.426,28.403 h1.83
  text "Hole Size" at 121.662,28.403 h1.83
  text "Plated" at 150.609,28.403 h1.83
  text "Hole Type" at 163.458,28.403 h1.83
  text "Drill Layer Pair" at 182.097,28.403 h1.83
  text "Via/Pad" at 220.186,28.403 h1.83
  text "Pad Shape" at 235.168,28.403 h1.83
  text "Template" at 254.111,28.403 h1.83
  text "Description" at 277.472,28.403 h1.83
  text "Hole Tolerance (+)" at 299.158,28.403 h1.83
  text "Hole Tolerance (-)" at 333.032,28.403 h1.83
  text "4" at 106.426,24.593 h1.52
  text "1.500mm (59.06mil)" at 121.662,24.593 h1.52
  text "PTH" at 150.609,24.593 h1.52
  text "Round" at 163.458,24.593 h1.52
  text "Top Layer - Bottom Layer" at 182.097,24.593 h1.52
  text "Pad" at 220.186,24.593 h1.52
  text "(Mixed)" at 235.168,24.593 h1.52
  text "(Mixed)" at 254.111,24.593 h1.52
  text "4" at 106.426,20.783 h1.52
  text "3.100mm (122.05mil)" at 121.662,20.783 h1.52
  text "PTH" at 150.609,20.783 h1.52
  text "Round" at 163.458,20.783 h1.52
  text "Top Layer - Bottom Layer" at 182.097,20.783 h1.52
  text "Pad" at 220.186,20.783 h1.52
  text "Rounded" at 235.168,20.783 h1.52
  text "c690h310m700p0" at 254.111,20.783 h1.52
  text "5" at 106.426,16.973 h1.52
  text "0.900mm (35.43mil)" at 121.662,16.973 h1.52
  text "PTH" at 150.609,16.973 h1.52
  text "Round" at 163.458,16.973 h1.52
  text "Top Layer - Bottom Layer" at 182.097,16.973 h1.52
  text "Pad" at 220.186,16.973 h1.52
  text "(Mixed)" at 235.168,16.973 h1.52
  text "(Mixed)" at 254.111,16.973 h1.52
  text "12" at 106.426,13.163 h1.52
  text "1.100mm (43.31mil)" at 121.662,13.163 h1.52
  text "PTH" at 150.609,13.163 h1.52
  text "Round" at 163.458,13.163 h1.52
  text "Top Layer - Bottom Layer" at 182.097,13.163 h1.52
  text "Pad" at 220.186,13.163 h1.52
  text "(Mixed)" at 235.168,13.163 h1.52
  text "(Mixed)" at 254.111,13.163 h1.52
  text "14" at 106.426,9.353 h1.52
  text "0.650mm (25.59mil)" at 121.662,9.353 h1.52
  text "PTH" at 150.609,9.353 h1.52
  text "Round" at 163.458,9.353 h1.52
  text "Top Layer - Bottom Layer" at 182.097,9.353 h1.52
  text "Pad" at 220.186,9.353 h1.52
  text "(Mixed)" at 235.168,9.353 h1.52
  text "(Mixed)" at 254.111,9.353 h1.52
  text "259" at 106.426,5.543 h1.52
  text "0.305mm (12.00mil)" at 121.662,5.543 h1.52
  text "PTH" at 150.609,5.543 h1.52
  text "Round" at 163.458,5.543 h1.52
  text "Top Layer - Bottom Layer" at 182.097,5.543 h1.52
  text "Via" at 220.186,5.543 h1.52
  text "Rounded" at 235.168,5.543 h1.52
  text "(Mixed)" at 254.111,5.543 h1.52
  text "298 Total" at 106.426,1.733 h1.52

## Dimensions
0,0 to 85,4.9 on Mechanical 2
0,0 to 7.9,54 on Mechanical 2